# Altium PCB front_flex.PcbDoc (part 1 of 2)
Units mil, origin at the board's own origin, x right, y up, seen from the top; angles counter-clockwise.
Board outline 5591.04 x 1020.3 mil, 4 copper layers (Layer 1 (Top Layer), Layer 2 (PWR), Layer 3 (GND), Layer 4 (Bottom Layer)), stack 21.036 mil thick; 26 components, 44 nets, 150 pads, 87 vias.
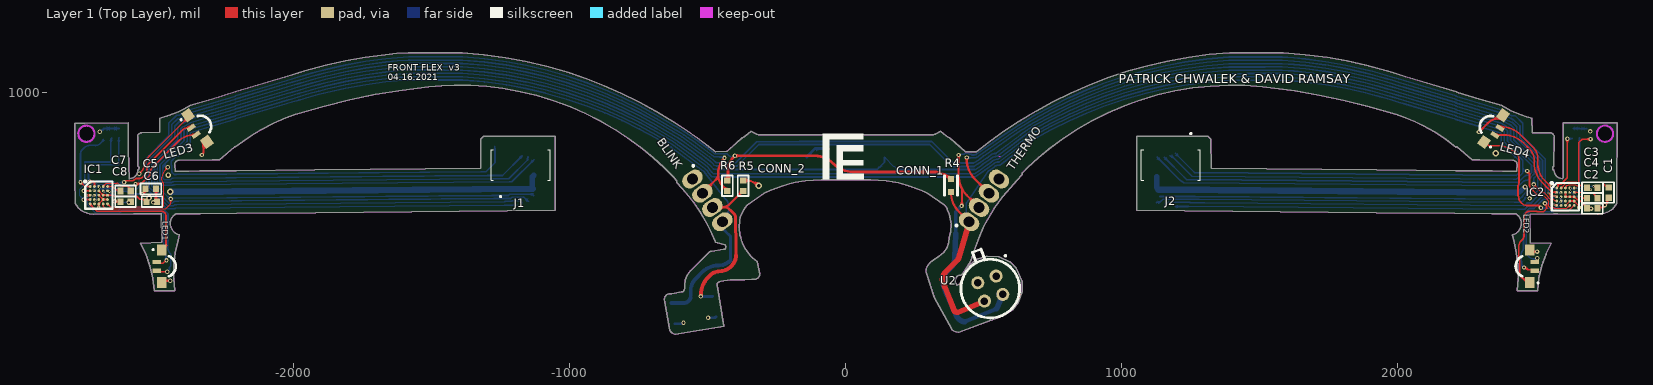
[diagram p0: Layer 1 (Top Layer) view]
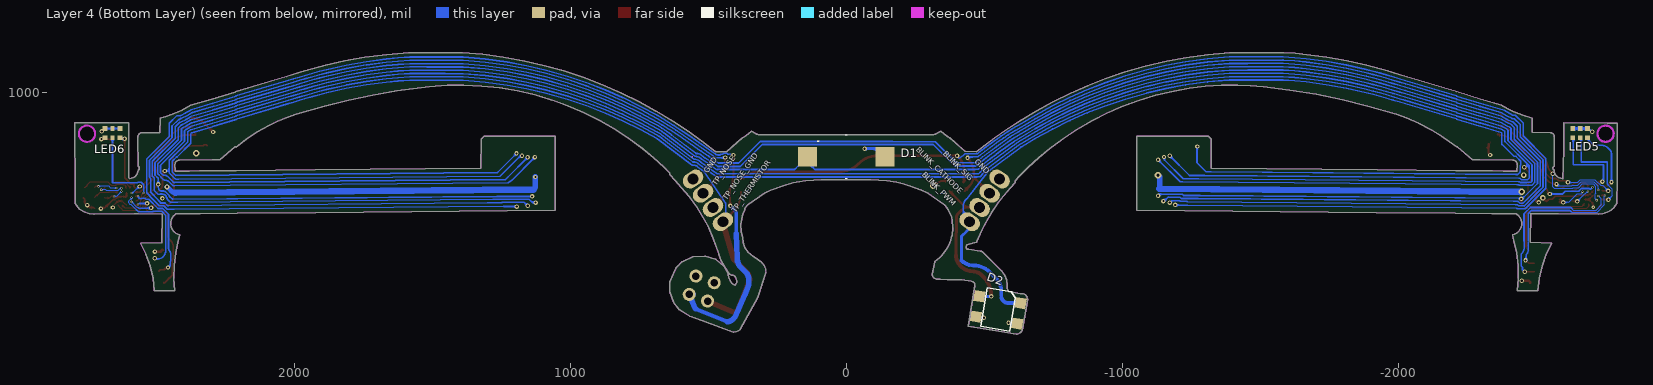
[diagram p1: Layer 4 (Bottom Layer) view, seen from below]
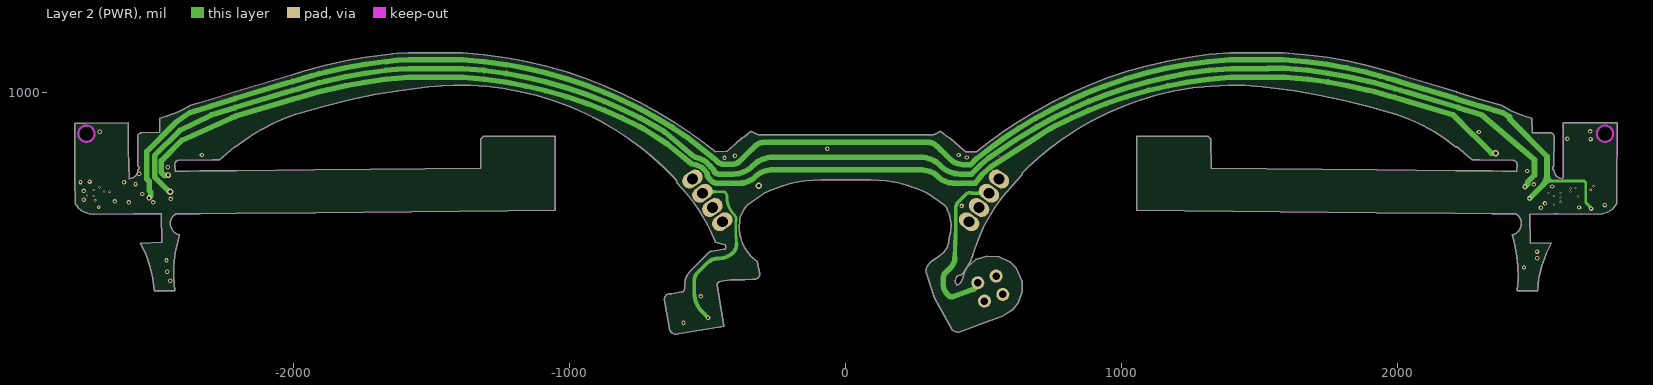
[diagram p2: Layer 2 (PWR)]
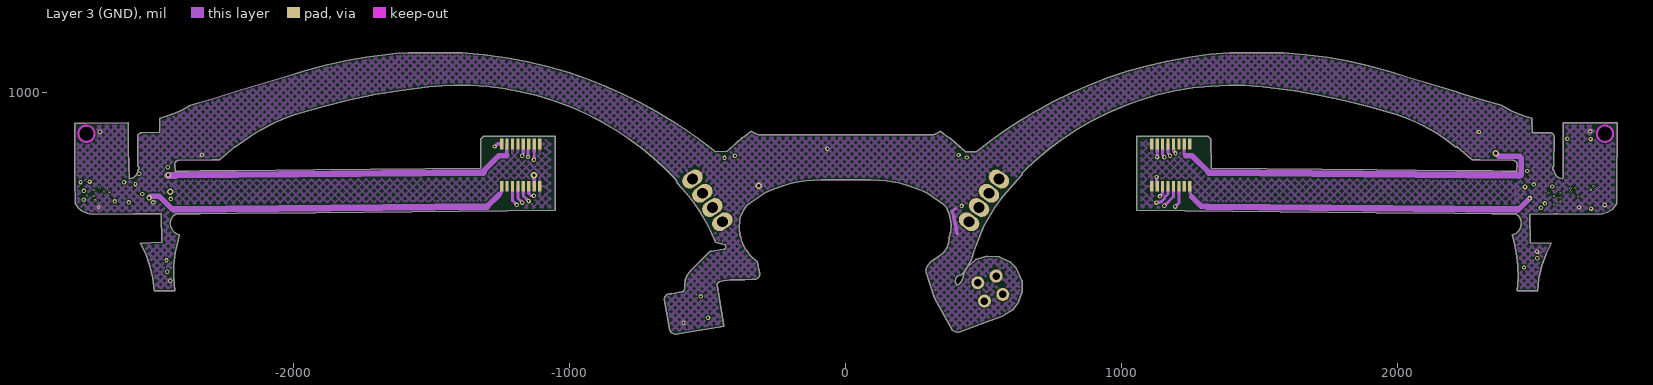
[diagram p3: Layer 3 (GND)]
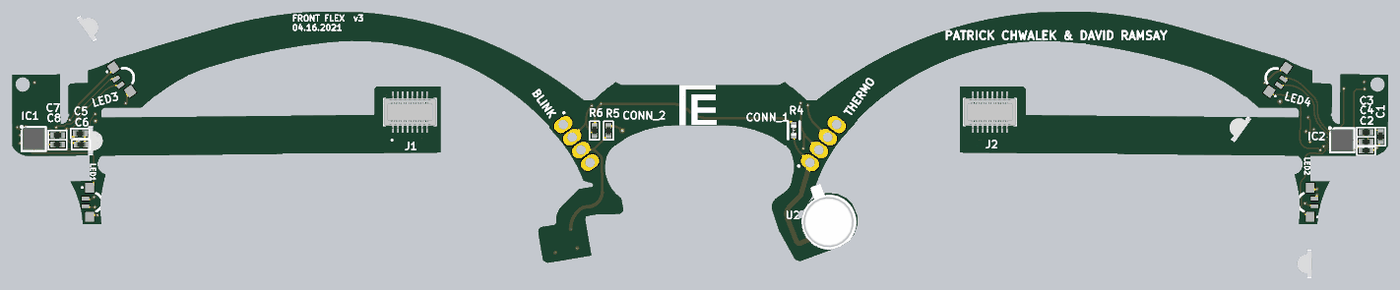
[diagram p5: 3D render of the assembled board from above, using the file's embedded part models]
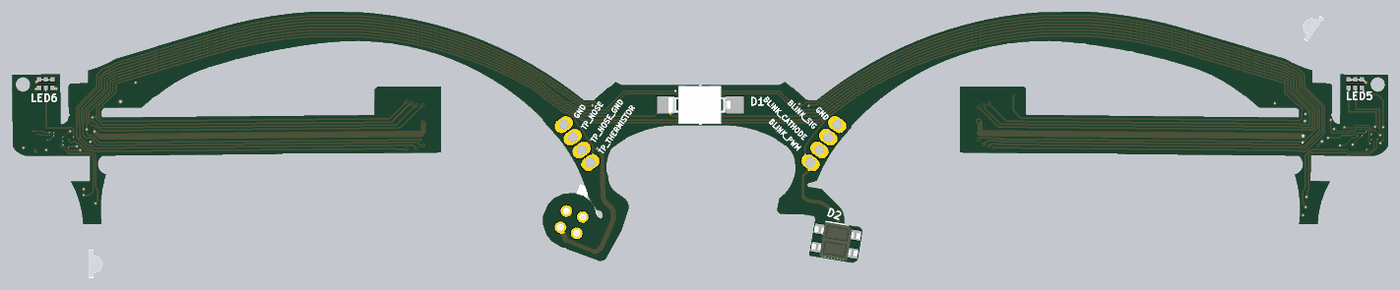
[diagram p6: 3D render of the assembled board from below, using the file's embedded part models]

## Layer stack, top to bottom
Top Solder: solder mask 1, SM-002, Dk 4
Layer 1 (Top Layer): signal copper 0.709
Dielectric 2: prepreg 2.8, PP-006, Dk 4.1
Layer 2 (PWR): signal copper 0.709
Dielectric 1: dielectric 12.6, FR-4, Dk 4.8
Layer 3 (GND): signal copper 0.709
Dielectric 3: prepreg 2.8, PP-006, Dk 4.1
Layer 4 (Bottom Layer): signal copper 0.709
Bottom Solder: solder mask 1, SM-002, Dk 4

## Board outline
570 vertices, not listed, extent -2794.4,125.06 2796.64,1145.35
cut-out: 2745.53,821.61 2750.93,820.83 2756.32,821.06 2761.63,822.28 2766.6,824.41 2771.08,827.44 2774.98,831.26 2778.09,835.71 2780.3,840.67 2781.6,845.91 2781.91,851.34 2781.24,856.73 2779.59,861.89 2777.03,866.65 2773.6,870.91 2769.47,874.41 2764.78,877.13 2762.11,878.23 2759.31,879.05 2753.92,879.8 2748.52,879.61 2743.21,878.39 2738.25,876.22 2733.76,873.19 2729.86,869.37 2726.75,864.92 2724.55,860 2723.25,854.72 2722.93,849.33 2723.6,843.94 2725.26,838.78 2727.82,833.98 2731.24,829.76 2735.38,826.22 2740.06,823.5 2742.74,822.44
cut-out: -2746.95,879.53 -2752.38,879.84 -2755.26,879.57 -2758.13,879.05 -2763.29,877.28 -2768.01,874.65 -2772.18,871.18 -2775.61,866.97 -2778.25,862.24 -2779.98,857.09 -2780.73,851.73 -2780.49,846.3 -2779.27,841.02 -2777.11,836.06 -2774.03,831.57 -2770.22,827.72 -2765.77,824.61 -2760.81,822.4 -2755.53,821.1 -2750.14,820.83 -2747.22,821.06 -2744.35,821.61 -2739.23,823.35 -2734.51,826.02 -2730.33,829.49 -2726.87,833.66 -2724.23,838.43 -2722.5,843.54 -2721.75,848.94 -2721.99,854.33 -2723.25,859.65 -2725.41,864.61 -2728.44,869.09 -2732.26,872.95 -2736.75,876.02 -2741.67,878.27
board region "Layer Stack Region 1": 2429.51,560.75 2380.53,561.18 2341.28,561.53 2207.66,562.76 1922.11,565.39 1054.31,573.35 1054.31,842.87 1312.78,842.87 1323.53,831.85 1324.63,726.22 1326.04,725.79 1925.02,720.31 2210.57,717.72 2342.7,716.5 2382.03,716.14 2430.3,715.75 2432.23,715.74
board region "Layer Stack Region 1": -2424.82,715.71 -2380.81,716.14 -2341.51,716.5 -2209.43,717.72 -1923.84,720.31 -1323.01,726.93 -1322.62,728.31 -1322.62,832.13 -1311.87,842.87 -1053.36,843.15 -1053.36,573.35 -1920.92,565.39 -2206.48,562.76 -2340.1,561.53 -2379.43,561.18 -2423.37,560.78 -2425.18,560.77
board region "Layer Stack Region 1": 534 vertices, not listed, extent -2794.4,125.06 2796.64,1145.35

## Design rules (kind name [scope] priority, off if disabled: settings)
Clearance [All] p1: gap=4 ignorepadtopadclearanceinfootprint=FALSE except(0: Arc-Hole Track-Hole SMDPad-Hole THPad-Hole Via-Hole Fill-Hole Poly-Hole Region-Hole Text-Hole)
DiffPairsRouting [All] p1: maxlimit=10 minlimit=10 mostfreqgap=10 toplayer_minwidth=15 toplayer_maxwidth=15 toplayer_prefwidth=15 midlayer1_minwidth=15 midlayer1_maxwidth=15 midlayer1_prefwidth=15 midlayer2_minwidth=15 midlayer2_maxwidth=15 midlayer2_prefwidth=15 bottomlayer_minwidth=15 bottomlayer_maxwidth=15 bottomlayer_prefwidth=15 substack1={A9119681-F30E-4965-AEFB-5FD7E99CBF57} toplayer_{a9119681-f30e-4965-aefb-5fd7e99cbf57}_minwidth=15 toplayer_{a9119681-f30e-4965-aefb-5fd7e99cbf57}_maxwidth=15 toplayer_{a9119681-f30e-4965-aefb-5fd7e99cbf57}_prefwidth=15 midlayer1_{a9119681-f30e-4965-aefb-5fd7e99cbf57}_minwidth=15 midlayer1_{a9119681-f30e-4965-aefb-5fd7e99cbf57}_maxwidth=15 midlayer1_{a9119681-f30e-4965-aefb-5fd7e99cbf57}_prefwidth=15 midlayer2_{a9119681-f30e-4965-aefb-5fd7e99cbf57}_minwidth=15 midlayer2_{a9119681-f30e-4965-aefb-5fd7e99cbf57}_maxwidth=15 midlayer2_{a9119681-f30e-4965-aefb-5fd7e99cbf57}_prefwidth=15 bottomlayer_{a9119681-f30e-4965-aefb-5fd7e99cbf57}_minwidth=15 bottomlayer_{a9119681-f30e-4965-aefb-5fd7e99cbf57}_maxwidth=15 bottomlayer_{a9119681-f30e-4965-aefb-5fd7e99cbf57}_prefwidth=15 substack2={F6C10761-EC22-4305-87DD-0F5299EFC78A} toplayer_{f6c10761-ec22-4305-87dd-0f5299efc78a}_minwidth=15 toplayer_{f6c10761-ec22-4305-87dd-0f5299efc78a}_maxwidth=15 toplayer_{f6c10761-ec22-4305-87dd-0f5299efc78a}_prefwidth=15 midlayer1_{f6c10761-ec22-4305-87dd-0f5299efc78a}_minwidth=15 midlayer1_{f6c10761-ec22-4305-87dd-0f5299efc78a}_maxwidth=15 midlayer1_{f6c10761-ec22-4305-87dd-0f5299efc78a}_prefwidth=15 midlayer2_{f6c10761-ec22-4305-87dd-0f5299efc78a}_minwidth=15 midlayer2_{f6c10761-ec22-4305-87dd-0f5299efc78a}_maxwidth=15 midlayer2_{f6c10761-ec22-4305-87dd-0f5299efc78a}_prefwidth=15 bottomlayer_{f6c10761-ec22-4305-87dd-0f5299efc78a}_minwidth=15 bottomlayer_{f6c10761-ec22-4305-87dd-0f5299efc78a}_maxwidth=15 bottomlayer_{f6c10761-ec22-4305-87dd-0f5299efc78a}_prefwidth=15 maxuncoupledlength=500
PlaneClearance [All] p1: clearance=8
PlaneConnect GND [InNet('GND')] p1: planeconnectstyle=Direct reliefexpansion=20 reliefentries=4 reliefconductorwidth=10 reliefairgap=10
PlaneConnect [All] p2: planeconnectstyle=Direct reliefexpansion=20 reliefentries=4 reliefconductorwidth=10 reliefairgap=10
PolygonConnect GND_1 [InNet('GND')] p1: thpad.connectstyle=Relief thpad.reliefconductorwidth=10 thpad.reliefentries=4 thpad.polygonreliefangle="90 Angle" thpad.airgapwidth=10 smdpad.connectstyle=Relief smdpad.reliefconductorwidth=10 smdpad.reliefentries=4 smdpad.polygonreliefangle="90 Angle" smdpad.airgapwidth=10 via.connectstyle=Direct via.reliefconductorwidth=10 via.reliefentries=4 via.polygonreliefangle="90 Angle" via.airgapwidth=10
PolygonConnect [All] p2: connectstyle=Relief reliefconductorwidth=10 reliefentries=4 polygonreliefangle="90 Angle" airgapwidth=10
RoutingCorners [All] p1: cornerstyle=Round minsetback=100 maxsetback=100
RoutingVias [All] p1: holewidth=8 width=16 viastyle="Through Hole" minholewidth=4 minwidth=8 maxholewidth=12 maxwidth=24
SolderMaskExpansion [All] p1: expansion=4 istentingtop=FALSE
Width POWER [InNet('3.3V') or InNet('5V') or InNet('BATTERY_1') or InNet('VBAT')] p1: maxlimit=30 minlimit=4 preferedwidth=20 toplayer_prefwidth=8 midlayer1_prefwidth=10 bottomlayer_prefwidth=8 substack1={A9119681-F30E-4965-AEFB-5FD7E99CBF57} substack2={F6C10761-EC22-4305-87DD-0F5299EFC78A} minimp=50.000000 maximp=50.000000 favimp=50.000000
Width [All] p2: maxlimit=10 minlimit=4 preferedwidth=10 toplayer_prefwidth=6 midlayer1_minwidth=10 midlayer2_minwidth=10 bottomlayer_prefwidth=6 substack1={A9119681-F30E-4965-AEFB-5FD7E99CBF57} substack2={F6C10761-EC22-4305-87DD-0F5299EFC78A} minimp=50.000000 maximp=50.000000 favimp=50.000000
26 further rules are at their usual default settings.

## Classes and differential pairs
component class Sch_led: C1 C2 C3 C4 C5 C6 C7 C8 IC1 IC2 J1 J2 LED1 LED2 LED3 LED4 LED5 LED6
component class Sch_front: CONN_1 CONN_2 D1 D2 R4 R5 R6 U2

## Components (designator, comment, footprint, x,y, rotation, side; value= is the part's Value field where it differs from the comment)
C1 "1µF" 0402R 2765.05,638.31 r90 top
C2 "1µF" 0402R 2706.02,581.51 r180 top
C3 "0.47µF" 0402R 2706.01,656.3 r180 top
C4 "0.47µF" 0402R 2706.02,616.93 r180 top
C5 "1µF" 0402R -2518.48,651.43 r180 top
C6 "1µF" 0402R -2514.43,605.63 r180 top
C7 "0.47µF" 0402R -2610.08,643.98 r0 top
C8 "0.47µF" 0402R -2610.08,605.63 r180 top
CONN_1 "THERMO" 4_POS_1MM_HEADER 501.25,610.02 r55 top
CONN_2 "BLINK" 4_POS_1MM_HEADER -501.25,610.02 r305 top
D1 "VBPW34FASR" VBPW34FAS 0,767.67 r180 bottom
D2 "QRE1113GR" *4LEADSMD_QRE1113GR(PRIMARY) -550.53,212.31 r9.5 bottom
IC1 "LP5523TM_NOPB" BGA25C40P5X5_226X226X68 -2706.84,628.81 r0 top
IC2 "LP5523TM_NOPB" BGA25C40P5X5_226X226X68 2608.64,623.29 r0 top
J1 "55560-0168" 555600168 -1178.04,737.95 r0 top
J2 "55560-0168" 555600168 1178.03,737.95 r180 top
LED1 "APFA3010SEKJ3ZGKQBKC" KPFA-3010RGBC-11 -2486.98,371.04 r90 top
LED2 "APFA3010SEKJ3ZGKQBKC" KPFA-3010RGBC-11 2486.98,371.04 r270 top
LED3 "APFA3010SEKJ3ZGKQBKC" KPFA-3010RGBC-11 -2355.09,866.3 r125.5 top
LED4 "APFA3010SEKJ3ZGKQBKC" KPFA-3010RGBC-11 2353.64,865.3 r234.5 top
LED5 "SMLP36RGB2W3R" ROHM-1510-(0604) -2659.41,853.66 r180 bottom
LED6 "SMLP36RGB2W3R" ROHM-1510-(0604) 2659.41,853.66 r180 bottom
R4 "100k" SMD-0402-RES 381.34,664.08 r180 top
R5 "100" 0402R -372.08,662.99 r270 top
R6 "51.1K" 0402R -428.65,662.99 r90 top
U2 "ZTP-135SR" ZTP-135SR 524.02,290.32 r335 top

## Footprints (in the part's own frame and the unit in brackets; to place one, negate y for a bottom-side part, rotate by r counter-clockwise, add the part's x,y. Pads: shape width x height; smd on the part's side, far side on the other; paste and mask are expansions set on the pad)
4_POS_1MM_HEADER [mm]
  oval 1.4x2 hole 1: 1(-2.4,0) 2(-0.8,0) 3(0.8,0) 4(2.4,0)
  silkscreen extent -3.4,0.7 -3.3,0.8
0402R [mm]
  rect 0.559x0.6 smd: 1(-0.48,0) 2(0.48,0)
  silkscreen extent -0.95,-0.5 0.95,0.5, body extent -0.46,-0.25 0.5,0.25, height 0.3
555600168 [mm]
  rect 0.3x1 on Mid1: 1(-1.75,-1.95) 2(-1.75,1.95) 3(-1.25,-1.95) 4(-1.25,1.95) 5(-0.75,-1.95) 6(-0.75,1.95) 7(-0.25,-1.95) 8(-0.25,1.95) 9(0.25,-1.95) 10(0.25,1.95) 11(0.75,-1.95) 12(0.75,1.95) 13(1.25,-1.95) 14(1.25,1.95) 15(1.75,-1.95) 16(1.75,1.95)
  silkscreen extent -2.73,-2.95 2.73,1.42, body extent -2.72,-2.15 2.73,2.15, height 1.16
*4LEADSMD_QRE1113GR(PRIMARY) [mm]
  rect 1x1 smd: A(-1.93,-0.97) C(1.93,0.94) E(-1.93,0.94) K(1.93,-0.97)
  silkscreen extent -1.35,-1.85 1.35,1.75, body extent -2.4,-1.8 2.4,1.8, height 1.85
BGA25C40P5X5_226X226X68 [mil]
  round 10 smd: A1(-31.5,31.5) A2(-15.75,31.5) A3(0,31.5) A4(15.75,31.5) A5(31.5,31.5) B1(-31.5,15.75) B2(-15.75,15.75) B3(0,15.75) B4(15.75,15.75) B5(31.5,15.75) C1(-31.5,0) C2(-15.75,0) C3(0,0) C4(15.75,0) C5(31.5,0) D1(-31.5,-15.75) D2(-15.75,-15.75) D3(0,-15.75) D4(15.75,-15.75) D5(31.5,-15.75) E1(-31.5,-31.5) E2(-15.75,-31.5) E3(0,-31.5) E4(15.75,-31.5) E5(31.5,-31.5)
  silkscreen extent -53,-49 49,53, body extent -44,-44 44,44, height 27
KPFA-3010RGBC-11 [mm]
  rect 1x0.9 smd: 1(1.5,-0.2) 2(-1.5,-0.2)
  rect 0.4x0.8 smd: 3(-0.4,0.25) 4(0.4,0.25)
  silkscreen extent -0.92,-1.5 1.54,0.59, body extent -1.36,-1.55 1.64,-0.05, height 1.02
ROHM-1510-(0604) [mm]
  rect 0.45x0.45 smd: 1(-0.675,-0.425) 3(0.675,-0.425) 4(0.675,0.425) 6(-0.675,0.425)
  rect 0.4x0.45 smd: 2(0,-0.425) 5(0,0.425)
SMD-0402-RES [mm]
  rect 0.55x0.55 smd: 1(0,0.584) 2(0,-0.584)
  silkscreen extent -0.6,-0.9 0.6,0.9, body extent -0.28,-0.57 0.27,0.58, height 0.41
VBPW34FAS [mm] "IR Photodiode SMD (Vive)"
  rect 1.75x1.8 smd: 1(-3.575,0) 2(3.575,0)
  silkscreen extent -2.65,-2 0.08,2, body extent -3.29,-1.95 3.11,1.95, height 1.48
ZTP-135SR [mm]
  round 1.2 hole 0.7: 1(0,1.27) 2(1.27,0) 3(0,-1.27) 4(-1.27,0)
  silkscreen extent -2.9,-2.7 2.7,3.35, body extent -3.24,-2.79 2.74,3.19, height 2.67

## Part data
C1 C2 C5 C6: library part GCM155C71A105KE38D, "CAP CER 1UF 10V X7S 0402", Digi-Key Part Number=490-13409-1-ND, Manufacturer="Murata Electronics North America", Operating Temperature="-55°C ~ 125°C", Package / Case="0402 (1005 Metric)", Ratings=AEC-Q200, Temperature Coefficient=X7S, Tolerance=±10%, Voltage=10V, @ qty=0, Applications=Automotive, Datasheets=http://www.murata.com/~/media/webrenewal/support/library/catalog/products/capacitor/mlcc/c03e.ashx, Factory Stock=0, Features=-, Height - Seated (Max)=-, Image=//media.digikey.com/Renders/Murata%20Renders/ZRB-SERIES-0402.jpg, Lead Spacing=-, Lead Style=-, Minimum Quantity=1, Mounting Type="Surface Mount, MLCC", Packaging="Cut Tape (CT)", Part Number=GCM155C71A105KE38D, Part Status=Active, Quantity Available=7240, Series=GCM, Size / Dimension="0.039\" L x 0.020\" W (1.00mm x 0.50mm)", Thickness (Max)="0.022\" (0.55mm)", Unit Price (USD)=0.12
C3 C4 C7 C8: library part GCM155C71A105KE38D, "CAP CER 0.47UF 10V X7S 0402", Digi-Key Part Number=490-13409-1-ND, Manufacturer="Murata Electronics North America", Operating Temperature="-55°C ~ 125°C", Package / Case="0402 (1005 Metric)", Ratings=AEC-Q200, Temperature Coefficient=X7S, Tolerance=±10%, Voltage=10V, @ qty=0, Applications=Automotive, Datasheets=http://www.murata.com/~/media/webrenewal/support/library/catalog/products/capacitor/mlcc/c03e.ashx, Factory Stock=0, Features=-, Height - Seated (Max)=-, Image=//media.digikey.com/Renders/Murata%20Renders/ZRB-SERIES-0402.jpg, Lead Spacing=-, Lead Style=-, Minimum Quantity=1, Mounting Type="Surface Mount, MLCC", Packaging="Cut Tape (CT)", Part Number=GCM155C71A105KE38D, Part Status=Active, Quantity Available=7240, Series=GCM, Size / Dimension="0.039\" L x 0.020\" W (1.00mm x 0.50mm)", Thickness (Max)="0.022\" (0.55mm)", Unit Price (USD)=0.12
CONN_1 CONN_2: library part 4_pin_1mm_header
D1: "Diode", Manufacturer_Name=Vishay, Mouser Part Number=782-VBPW34FASR, RS Part Number=7689401, Datasheet Link=https://www.vishay.com/docs/81127/vbpw34fa.pdf, Height=1.3mm, Manufacturer_Part_Number=VBPW34FASR, Mouser Price/Stock=https://www.mouser.com/Search/Refine.aspx?Keyword=782-VBPW34FASR, RS Price/Stock=https://uk.rs-online.com/web/p/products/7689401
D2: "QRE1113 Series 30 V 50 mA Miniature Reflective Object Sensor - SMD-4", Package="SMD-4 ON Semiconductor", Availability=Unavailable, MF="ON Semiconductor", MP=QRE1113GR, Price=None, SnapEDA_Link=https://www.snapeda.com/parts/QRE1113GR/ON%20Semiconductor/view-part/?ref=snap
IC1 IC2: "Integrated Circuit", Manufacturer_Name="Texas Instruments", Manufacturer_Part_Number=LP5523TM/NOPB, Datasheet Link=http://www.ti.com/lit/gpn/lp5523, Height=0.675mm
J1 J2: "Connector", Manufacturer_Name=Molex, Mouser Part Number=538-55560-0168, RS Part Number=7206558P, Allied_Number=70374726, Allied Price/Stock=https://www.alliedelec.com/molexincorporated-55560-0168/70374726/, Datasheet Link=https://www.molex.com/pdm_docs/sd/555600168_sd.pdf, Height=1.15mm, Manufacturer_Part_Number=55560-0168, Mouser Price/Stock=https://www.mouser.com/Search/Refine.aspx?Keyword=538-55560-0168, RS Price/Stock=http://uk.rs-online.com/web/p/products/7206558P
LED1 LED2 LED3 LED4: "LED", Manufacturer_Name=Kingbright, Mouser Part Number=604-APFA3010SEKJ3ZGK, Allied_Number=70820377, Allied Price/Stock=https://www.alliedelec.com/kingbright-apfa3010sekj3zgkqbkc/70820377/, Datasheet Link=http://www.kingbrightusa.com/images/catalog/SPEC/APFA3010SEKJ3ZGKQBKC.pdf, Manufacturer_Part_Number=APFA3010SEKJ3ZGKQBKC, Mouser Price/Stock=https://www.mouser.com/Search/Refine.aspx?Keyword=604-APFA3010SEKJ3ZGK
LED5 LED6: "LED", Manufacturer_Name="ROHM Semiconductor", Mouser Part Number=755-SMLP36RGB2W3R, RS Part Number=1246884, Datasheet Link=http://www.rohm.com/web/global/datasheet/SMLP36RGB2W(R), Manufacturer_Part_Number=SMLP36RGB2W3R, Mouser Price/Stock=https://www.mouser.com/Search/Refine.aspx?Keyword=755-SMLP36RGB2W3R, RS Price/Stock=https://uk.rs-online.com/web/p/products/1246884
R4: library part ERJ-2GEJ104X, "RES SMD 100K OHM 5% 1/10W 0402", Digi-Key Part Number=P100KJCT-ND, Manufacturer="Panasonic Electronic Components", Operating Temperature="-55°C ~ 155°C", Package / Case="0402 (1005 Metric)", Power (Watts)="0.1W, 1/10W", Supplier Device Package=0402, Temperature Coefficient=±200ppm/°C, Tolerance=±5%, @ qty=1500, Composition="Thick Film", Datasheets=http://industrial.panasonic.com/www-cgi/jvcr13pz.cgi?E+PZ+3+AOA0001+ERJ2GEJ104X+7+WW, Factory Stock=0, Failure Rate=-, Features="Automotive AEC-Q200", Height - Seated (Max)="0.016\" (0.40mm)", Image=//media.digikey.com/Photos/Panasonic%20Photos/ERJ-PA2-Series.jpg, Minimum Quantity=1, Number of Terminations=2, Packaging="Cut Tape (CT)", Part Number=ERJ-2GEJ104X, Part Status=Active, Quantity Available=2387986, Series=ERJ, Size / Dimension="0.039\" L x 0.020\" W (1.00mm x 0.50mm)", Unit Price (USD)=0.00350
R5: library part Resistor
R6: library part Resistor, "CRCW040251K1FKED"
U2: "Undefined or Miscellaneous", Manufacturer_Name="Amphenol Advanced Sensors", Mouser Part Number=527-ZTP-135SR, Allied_Number=70282698, Allied Price/Stock=https://www.alliedelec.com/amphenol-advanced-sensors-ztp-135sr/70282698/, Datasheet Link=https://www.amphenol-sensors.com/en/component/edocman/370-thermopile-ir-sensor-applications/download?Itemid=7967, Manufacturer_Part_Number=ZTP-135SR, Mouser Price/Stock=https://www.mouser.com/Search/Refine.aspx?Keyword=527-ZTP-135SR

## Via types
v1: diameter 16, hole 8, Layer 1 (Top Layer) to Layer 4 (Bottom Layer), tented both sides, 43 vias
v2: diameter 8, hole 4, Layer 1 (Top Layer) to Layer 4 (Bottom Layer), tented both sides, 19 vias
v3: diameter 16, hole 8, Layer 3 (GND) to Layer 4 (Bottom Layer), tented both sides, 17 vias
v4: diameter 24, hole 12, Layer 1 (Top Layer) to Layer 4 (Bottom Layer), tented both sides, 3 vias
v5: diameter 20, hole 10, Layer 1 (Top Layer) to Layer 4 (Bottom Layer), tented both sides, 2 vias
v6: diameter 18, hole 8, Layer 1 (Top Layer) to Layer 4 (Bottom Layer), tented both sides, 1 vias
v7: diameter 12, hole 6, Layer 1 (Top Layer) to Layer 4 (Bottom Layer), tented both sides, 1 vias
v8: diameter 24, hole 12, Layer 3 (GND) to Layer 4 (Bottom Layer), tented both sides, 1 vias

## Nets (pads, with @x,y where several pads share a name; then routed paths per layer and width w, separated by ;. In a path a pad name is that pad's centre, name@x,y a point inside that pad or via, vN(x,y) a via of type N, cw(c..) or ccw(c..) an arc to the next point about the centre after c; other vN are vias at no path point)
3.3V: J1.5 R4.2 R6.2 | length 4799
  Layer 1 (Top Layer) w10: R6.2@-428.65,681.89 ccw(c-434.31,687.55) -426.3,687.55 -426.3,719.92 cw(c-361.88,719.92) -407.44,765.47 v1(-401.49,771.42) -111.65,771.42 cw(c-111.65,677.91) -45.53,744.03 -44.07,742.57 ccw(c26.64,813.28) 26.64,713.28 318.08,713.28 cw(c318.08,623.82) R4.2@381.34,687.08 ; R6.2@-426.39,678.52 R6.2@-424.46,676.59
  Layer 3 (GND) w10: J1.5@-1207.57,661.18 -1207.57,609.07 v3(-1192.04,593.54)
  Layer 4 (Bottom Layer) w6: v3@-1192.04,591.99 -1192.89,592.84 -1236.74,592.84 -2430.07,581.9 -2430.21,581.9 -2431.91,580.19 -2444.01,580.19 -2444.51,579.69 -2460.74,579.69 -2475.35,594.3 -2534.88,653.83 -2534.88,761.79 -2452.92,843.75 -2452.92,890.28 -2424.96,918.24 -2415.31,918.24 -2384.45,936.57 -2296.29,962.47 -2212.03,987.84 -2212.05,989.31 -2027.38,1043.99 -2004.16,1050.86 -1981.48,1057.58 -1958.79,1064.3 -1934.04,1071.43 -1909.34,1078.15 -1884.54,1084.49 -1812.46,1100.67 -1739.75,1113.65 -1667.03,1123.33 -1624.87,1127.45 -1582.61,1130.47 -1520.87,1130.42 -1454.76,1130.33 -1388.64,1130.2 -1308.84,1123.29 -1229.5,1112.41 -1158.68,1099.25 -1088.65,1082.93 -1011.52,1061.06 -935.43,1035.32 -872.62,1010.82 -810.87,983.68 -747.3,952.45 -685.15,918.5 -624.51,881.9 -612.61,876.29 -581.43,857.37 -560.3,843.15 -534.44,824.28 -500.04,798.98 -479.44,782.4 -474.95,779.56 -462.07,778.39 -446.19,778.39 -445.52,779.06 -430.32,779.06 -422.65,771.39 -407.66,763.39
5V: J1.13 J2.14 | length 8474.4
  Layer 3 (GND) w10: v8(-1129.82,701.02) -1129.82,680.69 -1129.74,680.61 -1129.74,662.09 J1.13@-1128.83,661.18 ; v3(1126.77,694.87) 1126.77,681.72 1127.91,680.58 1127.91,662.09 J2.14@1128.82,661.18
  Layer 2 (PWR) w20: v4(-2447.81,640.97) -2451.37,640.97 -2504.88,694.49 -2504.88,771.99 -2413.25,863.62 -2300.83,918.33 -2300.54,918.42 ; -2296.79,919.87 -2212.54,945.24 -2212.55,946.71 -2027.88,1001.39 -2004.67,1008.27 -1981.98,1014.99 -1959.29,1021.71 -1934.54,1028.84 -1909.85,1035.55 -1885.04,1041.9 -1812.96,1058.07 -1740.25,1071.06 -1667.53,1080.74 -1625.37,1084.85 -1583.11,1087.87 -1521.37,1087.82 -1455.26,1087.74 -1389.14,1087.61 -1309.35,1080.7 -1230,1069.81 -1159.18,1056.65 -1089.15,1040.34 -1012.02,1018.46 -935.93,992.73 -873.12,968.22 -811.37,941.09 -747.8,909.86 -685.65,875.9 -655.33,857.6 -556.5,773.72 -544.91,766.19 -526.56,760.81 -517.02,756.2 -503.94,747.65 -491.02,734.73 cw(c-492.99,732.78) -490.22,732.78 -480.87,723.43 cw(c-492.15,712.14) -476.19,712.14 ccw(c-459.9,728.43) -459.9,705.39 -407.7,705.39 ccw(c-407.7,805.39) -336.99,734.68 -335.05,736.62 cw(c-264.34,665.91) -264.34,765.91 271.97,765.91 cw(c271.97,665.91) 342.68,736.62 344.72,734.58 ; 344.75,734.55 ccw(c414.87,804.73) 414.87,705.52 455.96,705.52 492.08,741.64 518.88,763.66 613.79,828.13 693.14,876.03 755.29,909.99 818.86,941.22 880.62,968.35 943.42,992.86 1019.52,1018.59 1096.65,1040.47 1166.68,1056.78 1237.5,1069.94 1316.84,1080.83 1396.64,1087.74 1462.75,1087.87 1528.87,1087.96 1590.61,1088 1632.87,1084.98 1675.03,1080.87 1747.74,1071.19 1820.45,1058.21 1892.54,1042.03 1917.34,1035.68 1942.04,1028.97 1966.79,1021.84 1989.48,1015.12 2012.16,1008.4 2035.37,1001.52 2220.04,946.84 2220.03,945.37 2304.29,920 2496.4,756.74 2496.4,701.92 2471.36,676.87 2471.36,668.85 v6@2464.72,662.21
  Layer 4 (Bottom Layer) w18: 2430.83,637.81 ccw(c2430.83,660.71) 2447.03,644.52 v6(2461.72,659.21)
  Layer 4 (Bottom Layer) w20: v4(-2447.81,640.97) -2438.32,640.97 v4@-2436.54,639.19 ; -1135.17,652.17 -1135.17,695.67 v8(-1129.82,701.02) ; v3(1126.77,694.87) 1126.77,690.21 1126.58,690.02 1126.58,657.15 1134.03,649.7
  Layer 4 (Bottom Layer) w25: v4@-2442.86,640.18 -1135.17,652.17 ; 1134.03,649.7 2430.83,637.81
BATTERY_1: J1.4 J2.3 | length 7986.3
  Layer 3 (GND) w10: v5@-2458.08,700.29 -2456.75,701.61 v5(-2455.44,701.61) ; -1228.81,771.84 -1228.81,794.65 -1228.16,795.3 -1228.16,813.82 J1.4@-1227.26,814.72 ; 1226.31,793.66 1226.31,777.34 1231.92,771.73
  Layer 3 (GND) w20: -1309.05,719.78 -1256.99,771.84 -1228.81,771.84 ; 1231.92,771.73 1254.59,771.73 1315.99,710.33 ; v4(2356.48,780.71) 2366.67,770.53 2442.16,770.53 2448.38,764.32 2448.38,702.31 2445.12,699.05
  Layer 3 (GND) w25: v5@-2458.08,700.29 -2428.97,700.29 ; -2422.55,701 -1312.36,711.18 ; 1315.99,710.33 2437.99,700.05
  Layer 2 (PWR) w20: v5(-2455.44,701.61) -2465.99,701.61 -2468.3,699.3 -2480.5,711.5 -2480.5,753.43 -2406.86,827.08 -2225.73,909.08 -2212.55,913.04 -2212.57,914.51 -2027.9,969.19 -2004.69,976.07 -1982,982.79 -1959.31,989.51 -1934.56,996.64 -1909.86,1003.35 -1885.06,1009.7 -1812.98,1025.88 -1740.27,1038.86 -1667.55,1048.54 -1625.39,1052.65 -1583.13,1055.67 -1521.39,1055.62 -1455.28,1055.54 -1389.16,1055.41 -1309.36,1048.5 -1230.02,1037.61 -1159.2,1024.45 -1089.17,1008.14 -1012.04,986.26 -935.95,960.53 -873.14,936.02 -811.39,908.89 -747.82,877.66 -732.28,869.17 -646.69,814.44 -558.92,742.19 -543.33,738.91 -519.08,728.85 -502.39,708.22 ccw(c-474.55,708.22) -494.24,688.53 -485.86,680.15 ccw(c-467.23,698.78) -467.23,672.44 -384.6,672.44 ccw(c-384.6,754.84) -326.33,696.57 cw(c-269.38,639.62) -269.38,720.16 275.78,720.16 cw(c275.78,636.68) 334.75,695.77 cw(c275.78,636.68) 334.82,695.71 ccw(c390.69,751.58) 390.69,672.57 469.98,672.57 493.33,702.12 525.19,730.93 654.19,814.57 739.77,869.3 755.31,877.79 818.88,909.02 880.64,936.15 943.44,960.66 1019.54,986.39 1096.67,1008.27 1166.7,1024.58 1237.52,1037.74 1316.86,1048.63 1396.66,1055.54 1462.77,1055.67 1528.88,1055.76 1590.62,1055.8 1632.88,1052.78 1675.04,1048.67 1747.76,1038.99 1820.47,1026.01 1892.56,1009.83 1917.36,1003.48 1942.06,996.77 1966.81,989.64 1989.49,982.92 2012.18,976.2 2035.39,969.32 2200.08,920.56 2270.47,850.17 ; 2272.91,849.59 2272.91,848.71 2340.14,781.48 2355.72,781.48 v4(2356.48,780.71)
BLINK_CATHODE: CONN_2.3 D2.K R5.2 | length 587.2
  Layer 1 (Top Layer) w4: CONN_2.3@-483.18,584.21 CONN_2.3@-448.37,584.21 ; R5.2@-374.11,643.25 cw(c-372.08,641.23) -373.07,643.92 cw(c-372.08,641.23) R5.2@-372.08,644.09
  Layer 1 (Top Layer) w8: CONN_2.3@-448.37,584.21 ccw(c-448.37,620.95) -436.24,586.27 ccw(c-448.37,620.95) -422.39,594.98 R5.2@-374.11,643.25
  Layer 1 (Top Layer) w10: v1(-525.03,261.81) v1@-525.03,265.74 ; -436.24,586.27 cw(c-457.05,534.75) -417.76,574.04 -403.54,559.83 cw(c-413.1,550.27) -399.58,550.27 -399.58,493.16 cw(c-405.24,487.51) -397.24,487.51 -397.24,411.02
  Layer 1 (Top Layer) w14: v1@-525.03,265.74 cw(c-430.11,265.74) -497.23,332.86 -492.01,338.09 cw(c-455.79,301.87) -455.79,353.09 ccw(c-455.79,406.73) -417.86,368.8 -412.52,374.14 ccw(c-449.4,411.02) -397.24,411.02
  Layer 4 (Bottom Layer) w10: v1(-525.03,261.81) -483.59,261.81 ccw(c-483.59,264.21) D2.K@-481.89,262.51
BLINK_PWM: CONN_2.4 D2.A J1.2 | length 4132.4
  Layer 1 (Top Layer) w6: CONN_2.4@-442.08,525.52 ccw(c-442.08,532.53) -437.13,527.57 CONN_2.4@-432.41,532.3
  Layer 3 (GND) w10: v3(-1272.3,805.2) -1262.78,814.72 J1.2@-1246.94,814.72
  Layer 4 (Bottom Layer) w6: -2375.27,853.83 -2375.27,811.97 -2378.2,811.97 -2420.87,769.3 -2426.87,769.3 -2444.26,751.91 -2444.26,738.68 -2442.09,736.51 -2442.09,716.8 ccw(c-2431.24,716.8) -2438.91,709.13 -2433.57,703.78 -2426.99,703.78 -1321.89,713.92 -1303.42,713.92 -1271.24,746.1 -1271.24,793.42 -1271.48,793.66 -1271.48,804.38 v3(-1272.3,805.2) ; -2375.27,855.33 -2298.01,878.29 -2297.73,878.37 ; -2296.29,878.47 -2212.03,903.84 -2212.05,905.31 -2027.38,959.99 -2004.16,966.86 -1981.48,973.58 -1958.79,980.3 -1934.04,987.43 -1909.34,994.15 -1884.54,1000.49 -1812.46,1016.67 -1739.75,1029.65 -1667.03,1039.33 -1624.87,1043.45 -1582.61,1046.47 -1520.87,1046.42 -1454.76,1046.33 -1388.64,1046.2 -1308.84,1039.29 -1229.5,1028.41 -1158.68,1015.25 -1088.65,998.93 -1011.52,977.06 -935.43,951.32 -872.62,926.82 -810.87,899.68 -747.3,868.45 -685.15,834.5 -633.35,803.23 -515,715.73 -435.84,615.43 cw(c-464.96,586.31) -423.78,586.31 -423.78,582.43 cw(c-487.88,582.43) CONN_2.4@-442.56,537.11 ; CONN_2.4@-436.79,520.99 -436.79,531.38 CONN_2.4@-415.14,553.03
  Layer 4 (Bottom Layer) w10: -562.56,256.5 ccw(c-588.5,264.26) -561.43,264.26 ; CONN_2.4@-447.05,532.61 -447.05,509.76 -436.96,499.66 ; -436.96,499.62 -417.4,480.06 -417.4,392.41
  Layer 4 (Bottom Layer) w14: D2.A@-631.78,237.43 -587.92,237.43 ccw(c-587.92,263.68) -569.35,245.12 ccw(c-588.5,264.26) -562.56,256.5 ; -561.43,264.26 -561.43,291.72 cw(c-495.16,279.4) -542.82,327.06 -519.94,349.94 cw(c-461.34,291.34) -461.34,374.21 ccw(c-461.34,436.36) -417.4,392.41
BLINK_SIG: CONN_2.2 D2.C J1.7 R6.1 | length 4748.1
  Layer 1 (Top Layer) w8: CONN_2.2@-519.31,635.82 -470.64,684.49 ccw(c-491.16,705.04) -462.12,705.04 ; v1(-439.31,764.06) ccw(c-384.24,708.99) -462.12,708.99 -462.12,705.04 ; R6.1@-428.65,644.09 -429.46,644.09 -438.46,653.09 -438.46,653.91 -445.49,660.93 cw(c-405.34,701.08) -462.12,701.08 -462.12,705.04
  Layer 3 (GND) w10: J1.7@-1187.89,661.18 -1187.89,617.67 v3(-1172.24,602.02)
  Layer 2 (PWR) w10: CONN_2.2@-519.31,635.82 cw(c-506.06,622.56) -506.06,641.31 -443.64,641.31 cw(c-443.64,631.09) -436.42,638.31 cw(c-451.01,623.72) -430.37,623.72 -430.37,621.25 ccw(c-342.13,621.25) -404.52,558.85 -404.61,558.77 cw(c-424.12,539.25) -396.52,539.25 -396.52,538.22 ccw(c-392.62,534.32) -398.14,534.32 -398.14,494.61 -395.89,449.75
  Layer 2 (PWR) w14: -502.08,382.18 -538.5,345.76 ccw(c-513.9,321.16) -548.69,321.16 -548.69,275.89 ccw(c-448.69,275.89) -519.4,205.18 v1(-498.66,184.43) ; -502.07,382.19 cw(c-459.88,339.98) -459.88,399.66 ccw(c-459.88,473.48) -407.69,421.28 ccw(c-436.16,449.75) -395.89,449.75
  Layer 4 (Bottom Layer) w6: -2297.73,950.37 -2298.01,950.29 -2375.27,927.33 -2393.36,916.85 -2412,907.34 -2413.04,906.3 -2420.57,906.3 -2442.09,884.78 -2442.09,840.44 -2524.88,757.64 -2524.88,657.97 -2513.73,646.82 -2504.49,637.57 -2456.6,589.69 -2456.1,590.19 -2436.05,590.19 -2431.68,594.57 -2424.27,594.57 -1235.74,605.47 -1234.2,607.01 -1209.55,607.01 -1208.26,608.31 -1198.48,608.31 -1198.25,608.54 -1180.99,608.54 -1174.48,602.02 v3(-1172.24,602.02) -1172.24,600.43 -1172.89,600.43 v3@-1173.36,600.91 ; -2296.29,950.47 -2212.03,975.84 -2212.05,977.31 -2027.38,1031.99 -2004.16,1038.86 -1981.48,1045.58 -1958.79,1052.3 -1934.04,1059.43 -1909.34,1066.15 -1884.54,1072.49 -1812.46,1088.67 -1739.75,1101.65 -1667.03,1111.33 -1624.87,1115.45 -1582.61,1118.47 -1520.87,1118.42 -1454.76,1118.33 -1388.64,1118.2 -1308.84,1111.29 -1229.5,1100.41 -1158.68,1087.25 -1088.65,1070.93 -1011.52,1049.06 -935.43,1023.32 -872.62,998.82 -810.87,971.68 -747.3,940.45 -685.15,906.5 -624.51,869.9 -614.19,864.37 -599.21,855.32 -585.74,847.02 -569.63,835.97 -551.73,823.87 -528.75,807.05 -502.31,787.12 -478.74,769.2 -458.79,767.27 v1@-442.39,767.14
  Layer 4 (Bottom Layer) w10: v1(-498.66,184.43) -478.95,184.43 ccw(c-478.95,197.81) D2.C@-469.48,188.35
EXPANSION_INT: J1.12 J2.11 | length 8291.9
  Layer 3 (GND) w10: v3(-1151.42,767.1) -1151.42,794.18 -1149.42,796.18 -1149.42,813.82 J1.12@-1148.52,814.72 ; J2.11@1148.5,814.72 1148.5,774.12 1155,767.62 v3(1155,766)
  Layer 4 (Bottom Layer) w6: -2297.73,902.37 -2298.01,902.29 -2375.27,879.33 -2393.36,868.85 -2398.09,864.12 -2398.09,826.36 -2484.88,739.57 -2484.88,679.45 -2480.73,675.3 -2467.31,675.3 -2466.62,674.61 -2443.04,674.61 -2439.56,678.1 -2436.42,678.1 -1276.47,688.62 -1220.64,688.62 -1153.14,756.13 -1153.14,762.56 -1150.62,765.07 -1150.62,766.31 v3(-1151.42,767.1) ; -2296.29,902.47 -2212.03,927.84 -2212.05,929.31 -2027.38,983.99 -2004.16,990.86 -1981.48,997.58 -1958.79,1004.3 -1934.04,1011.43 -1909.34,1018.15 -1884.54,1024.49 -1812.46,1040.67 -1739.75,1053.65 -1667.03,1063.33 -1624.87,1067.45 -1582.61,1070.47 -1520.87,1070.42 -1454.76,1070.33 -1388.64,1070.2 -1308.84,1063.29 -1229.5,1052.41 -1158.68,1039.25 -1088.65,1022.93 -1011.52,1001.06 -935.43,975.32 -872.62,950.82 -810.87,923.68 -747.3,892.45 -685.15,858.5 -624.51,821.9 -617.18,817.07 -509.59,738.46 -499.2,729.45 -494.01,723.42 -484.79,711.31 -479.4,705.92 -468.69,706.03 467.53,706.03 486.5,719.59 508.54,734.91 527.35,748.72 527.93,749.3 cw(c551.95,725.28) 551.95,759.25 655,837.18 664.91,844.49 670.27,848.66 673.34,851.07 684.89,857.72 747.04,891.68 810.61,922.91 872.36,950.04 935.17,974.55 1011.26,1000.28 1088.39,1022.16 1158.42,1038.47 1229.24,1051.63 1308.58,1062.51 1388.38,1069.42 1454.5,1069.56 1520.61,1069.64 1582.35,1069.69 1624.61,1066.67 1666.77,1062.56 1739.49,1052.88 1812.2,1039.89 1884.28,1023.71 1909.08,1017.37 1933.78,1010.66 1958.53,1003.53 1981.22,996.81 2003.91,990.08 2027.12,983.21 2211.79,928.53 2211.77,927.06 2296.03,901.69 ; v3(1155,766) 1228.02,692.98 1235.37,685.49 2434.22,674.61 ccw(c2434.22,683.38) 2440.42,677.18 2459.8,696.56 cw(c2470.15,686.21) 2470.15,700.85 ccw(c2470.15,714.77) 2480,704.93 2485.38,710.3 2485.38,737.62 2398.62,824.38 2398.62,862.13 2393.89,866.86 2375.8,877.34 ; 2296.26,901.39 2296.55,901.3 2373.8,878.34
GND: C1.1 C2.1 C5.1 C6.1 CONN_1.4 CONN_2.1 D1.2 D2.E IC1.C3 IC1.D4 IC1.D5 IC1.E3 IC2.D4 IC2.D5 IC2.E3 J1.6 J1.8 J1.15 J1.16 J2.15 J2.16 LED1.2 LED2.2 LED3.2 LED4.2 LED5.4 LED5.5 LED5.6 LED6.4 LED6.5 LED6.6 R5.1 U2.1 | length 868.6
  Layer 1 (Top Layer) w4: v7(-2706.96,585.42) -2706.96,597.18 -2706.84,597.3 IC1.D4@-2691.09,613.06 IC1.D5@-2675.34,613.06 ; IC1.C3@-2706.75,628.91 -2706.75,628.72 -2691.88,613.85 IC1.D4@-2691,613.85 ; LED1.2@-2481,310.09 -2478.75,307.83 LED1.2@-2475.93,307.83 ; R5.1@-372.08,681.89 R5.1@-361.14,681.89 ; LED2.2@2473.75,428.37 LED2.2@2475.56,426.56 ; IC2.E3@2608.62,591.81 2608.62,592.99 2610.79,595.16 2612.18,596.55 2613.19,596.55 2619.64,602.99 2619.64,604.01 2623.19,607.56 IC2.D5@2640.13,607.55 ; IC2.D5@2640.13,607.55 2655.83,591.85 2655.83,586.37 v1(2658.13,584.07)
  Layer 1 (Top Layer) w6: v1@-2510.44,602.72 v1@-2507.53,605.63 ; v1(-2509.54,602.72) v1@-2509.54,603.62 ; C6.1@-2499.58,605.69 -2499.53,605.63 C6.1@-2498.6,606.56 ; C2.1@2724.92,581.51 2730.97,584.16 2741.89,584.16 v1(2750.76,593.03) 2753.47,593.03 2757.89,597.45 2758.39,597.45 2759.88,598.94 2759.88,614.25 C1.1@2765.05,619.42
  Layer 1 (Top Layer) w8: C6.1@-2499.58,605.69 C5.1@-2499.58,651.43 ; v1(-2333.09,774.3) -2333.09,777.04 -2327.49,782.64 LED3.2@-2327.49,813.5 ; R5.1@-361.14,681.89 cw(c-361.14,617.37) v4(-315.51,662.99) ; v1(2294.91,857.82) 2326.66,889.57 cw(c2370.99,845.24) LED4.2@2370.99,907.93
  Layer 1 (Top Layer) w10: LED1.2@-2479.1,311.99 -2478.95,311.99 -2471.84,319.1 -2471.72,318.97 -2448,318.97 v1(-2447.81,318.78) ; LED2.2@2479.1,430.1 2484.97,424.23 v1(2505.87,424.23)
  Layer 3 (GND) w10: 392.46,549.45 384.04,571.02 397.67,579.26
  Layer 3 (GND) w13: 392.46,549.45 403.77,488.61
  Layer 4 (Bottom Layer) w6: LED6.4@2636.76,870.39 LED6.5@2659.41,870.39 ; LED6.5@2662.87,870.18 2685.17,870.18 2685.52,869.83 2685.98,870.3 LED6.6@2685.98,870.39
  Layer 4 (Bottom Layer) w8: v1(-2703.42,858.47) -2702.42,858.47 -2695.55,865.34 -2692.86,865.34 -2688,870.2 LED5.6@-2634.85,870.2
  Layer 4 (Bottom Layer) w10: D2.E@-619.37,163.27 -596.53,163.27 ccw(c-596.53,173.24) -589.48,166.19 cw(c-588.54,165.25) -588.54,166.58 v1(-587.92,166.58) ; D1.2@-140.75,767.67 -140.75,768.25 -111.3,797.7 -66.86,797.7 v1(-66.26,797.09)
  other v1: 2698.42,860.08
I2C_SCL: IC1.E5 IC2.E5 J1.10 J2.9 | length 8801.1
  Layer 1 (Top Layer) w4: IC1.E5@-2675.34,597.3 -2665.33,587.3 -2486.9,587.3 -2486.56,587.64 -2474.64,587.64 -2470.95,591.33 -2470.95,666.06 ccw(c-2482.64,666.06) -2474.37,674.33 cw(c-2463.22,685.48) -2478.99,685.48 -2478.99,693.13 cw(c-2396.15,669.36) v1(-2457.09,730.3) ; 2513.54,629.26 2526.97,629.26 2537.49,618.74 2537.49,618.61 2548.7,607.4 2548.7,588.02 2564.08,572.64 2619.77,572.64 2627.93,580.8 2628.94,580.8 2635.38,587.24 2635.38,588.26 2638.94,591.81 IC2.E5@2640.12,591.81
  Layer 1 (Top Layer) w6: v1(2470.38,716.52) ccw(c2476.46,716.52) 2472.16,712.21 2478.11,706.26 2478.11,665.71 ccw(c2494.66,665.71) 2482.95,654.01 2503.57,633.4 ccw(c2513.54,643.37) 2513.54,629.26
  Layer 3 (GND) w10: v3(-1172.25,771.73) -1172.25,773.35 -1168.2,777.4 J1.10@-1168.2,814.72 ; J2.9@1168.19,814.72 1168.19,780.51 1175.35,773.35 v3(1175.35,771.73)
  Layer 4 (Bottom Layer) w6: v1@-2459.79,730.3 -2464.92,735.43 -2474.88,735.43 ; -2297.73,890.37 -2298.01,890.29 -2375.27,867.33 -2386.42,860.87 -2386.42,823.12 -2387.19,823.12 -2474.88,735.43 ; -2296.29,890.47 -2212.03,915.84 -2212.05,917.31 -2027.38,971.99 -2004.16,978.86 -1981.48,985.58 -1958.79,992.3 -1934.04,999.43 -1909.34,1006.15 -1884.54,1012.49 -1812.46,1028.67 -1739.75,1041.65 -1667.03,1051.33 -1624.87,1055.45 -1582.61,1058.47 -1520.87,1058.42 -1454.76,1058.33 -1388.64,1058.2 -1308.84,1051.29 -1229.5,1040.41 -1158.68,1027.25 -1088.65,1010.93 -1011.52,989.06 -935.43,963.32 -872.62,938.82 -810.87,911.68 -747.3,880.45 -685.15,846.5 -624.51,809.9 -510.51,725.59 -501.89,717.16 -495.65,708.03 -484.87,695.5 -474.2,694.7 469.14,694.7 469.65,695.2 491.17,710.08 534.11,740.93 cw(c554,721.04) 554,749.16 555.58,749.16 654.81,824.28 678.08,841.93 680.91,842.95 684.89,845.72 747.04,879.68 810.61,910.91 872.36,938.04 935.17,962.55 1011.26,988.28 1088.39,1010.16 1158.42,1026.47 1229.24,1039.63 1308.58,1050.51 1388.38,1057.42 1454.5,1057.56 1520.61,1057.64 1582.35,1057.69 1624.61,1054.67 1666.77,1050.56 1739.49,1040.88 1812.2,1027.89 1884.28,1011.71 1909.08,1005.37 1933.78,998.66 1958.53,991.53 1981.22,984.81 2003.91,978.08 2027.12,971.21 2211.79,916.53 2211.77,915.06 2296.03,889.69 ; v3(-1172.25,771.73) -1243.65,700.32 -1298.42,700.32 -2436.49,689.89 -2441.91,689.89 -2447.18,684.61 -2462.48,684.61 -2463.16,685.3 -2469.11,685.3 -2474.88,691.07 -2474.88,735.43 ; v3(1175.35,771.73) 1177.26,769.82 1182.45,769.82 1255.06,697.22 2420.56,686.53 2425.72,686.53 ccw(c2425.72,699.22) 2434.7,690.25 2453.4,708.95 2453.4,717.42 2453.62,717.64 ; 2296.26,889.39 2296.55,889.3 2373.8,866.34 ; 2375.8,865.34 2386.95,858.88 2386.95,821.64 2431.28,777.31 2431.54,777.31 2453.62,755.23 2453.62,717.64 ; v1(2470.38,716.52) 2469.25,717.64 2453.62,717.64
I2C_SDA: IC1.E4 IC2.E4 J1.11 J2.12 | length 8977.7
  Layer 1 (Top Layer) w4: IC1.E4@-2691.09,597.31 -2691.09,589.06 -2681.32,579.3 -2483.58,579.3 -2483.24,579.64 -2463.73,579.64 -2446.41,596.96 v1(-2446.41,615.19) ; v1(2493.36,667.76) 2519.52,641.6 ccw(c2525.71,647.79) 2525.71,639.03 cw(c2525.71,628.32) 2533.29,635.9 2544.24,624.95 cw(c2541.22,621.93) 2545.49,622.06 cw(c2541.22,621.93) 2545.49,621.93 2556.7,610.72 2556.7,591.34 2567.4,580.64 2613.25,580.64 IC2.E4@2624.38,591.8 IC2.E4@2624.37,591.81
  Layer 3 (GND) w10: J1.11@-1148.52,661.18 -1148.27,660.94 -1148.27,634.62 -1140.68,627.02 v3(-1130.02,627.02) ; v3(1138.93,624.27) 1148.5,633.85 J2.12@1148.5,661.18
  Layer 4 (Bottom Layer) w6: v1@-2448.96,615.24 -2504.88,671.17 -2504.88,747.85 -2421.09,831.65 -2421.09,874.25 -2412,883.34 -2393.36,892.85 -2375.27,903.33 -2298.01,926.29 -2297.73,926.37 ; v1(-2446.41,615.19) -2446.41,615.4 -2444.65,617.16 -2435.72,617.16 -1282.57,627.63 -1220.65,627.63 -1220.65,629.38 -1218.2,631.84 -1209,631.92 -1201.01,631.99 ; -2296.29,926.47 -2212.03,951.84 -2212.05,953.31 -2027.38,1007.99 -2004.16,1014.86 -1981.48,1021.58 -1958.79,1028.3 -1934.04,1035.43 -1909.34,1042.15 -1884.54,1048.49 -1812.46,1064.67 -1739.75,1077.65 -1667.03,1087.33 -1624.87,1091.45 -1582.61,1094.47 -1520.87,1094.42 -1454.76,1094.33 -1388.64,1094.2 -1308.84,1087.29 -1229.5,1076.41 -1158.68,1063.25 -1088.65,1046.93 -1011.52,1025.06 -935.43,999.32 -872.62,974.82 -810.87,947.68 -747.3,916.45 -685.15,882.5 -624.51,845.9 -599.64,831.18 -570.65,810.7 -526.68,779.34 -491.01,752.29 -481.74,743.89 -477.21,737.85 -469.67,734.79 -393.65,734.39 -315.65,812.39 304.62,812.39 384.16,732.85 465.34,732.85 485.75,745.94 511.86,763.79 517.24,766.89 520.23,769.87 cw(c544.93,745.16) 544.93,780.1 633.56,846.87 638.4,850.97 651.22,860.8 659.19,866.53 664.18,869.2 668.58,871.77 669.8,872.68 684.89,881.72 747.04,915.68 810.61,946.91 872.36,974.04 935.17,998.55 1011.26,1024.28 1088.39,1046.16 1158.42,1062.47 1229.24,1075.63 1308.58,1086.51 1388.38,1093.42 1454.5,1093.56 1520.61,1093.64 1582.35,1093.69 1624.61,1090.67 1666.77,1086.56 1739.49,1076.88 1812.2,1063.89 1884.28,1047.71 1909.08,1041.37 1933.78,1034.66 1958.53,1027.53 1981.22,1020.81 2003.91,1014.08 2027.12,1007.21 2211.79,952.53 2211.77,951.06 2296.03,925.69 ; -1209,631.99 -1201.01,631.99 ; v3(-1130.02,627.02) -1135.59,632.59 -1201.01,631.99 ; v3(1138.93,624.27) 1266.24,624.27 2441.52,613.6 2448.98,621.05 2450.04,621.05 2453.6,624.62 2453.6,627.58 2468.25,642.22 2469.88,642.22 ; 2296.26,925.39 2296.55,925.3 2373.8,902.34 ; 2375.8,901.34 2393.89,890.86 2412.53,881.35 2421.62,872.26 2421.62,829.66 2505.38,745.9 2505.38,702.02 2493.36,690 v1(2493.36,667.76) 2493.36,658.4 cw(c2475.57,658.4) 2488.15,645.82 cw(c2483.65,650.32) 2483.65,643.96 2475.03,643.96 ccw(c2475.03,635.44) 2469.88,642.22 ; 2469.01,641.46 cw(c2475.03,635.44) 2469.88,642.22
IMU_INT: J1.9 J2.10 | length 8642
  Layer 3 (GND) w10: J1.9@-1168.2,661.18 -1168.2,626.27 v3(-1149.34,607.41) ; v3(1126.26,602) 1127.4,603.15 1141.85,603.15 1155.93,617.23 1155.93,621.23 1168.19,633.5 J2.10@1168.19,661.18
  Layer 4 (Bottom Layer) w6: -2297.73,938.37 -2298.01,938.29 -2375.27,915.33 -2393.36,904.85 -2412,895.34 -2415.05,895.34 -2432.09,878.3 -2432.09,836.3 -2514.88,753.5 -2514.88,662.12 -2453,600.23 -2452.67,600.23 -2452.62,600.19 -2440.2,600.19 -2433.74,606.65 -2416.99,606.65 -1275.71,617.01 -1213.7,617.01 -1208.96,621.75 ; -2296.29,938.47 -2212.03,963.84 -2212.05,965.31 -2027.38,1019.99 -2004.16,1026.86 -1981.48,1033.58 -1958.79,1040.3 -1934.04,1047.43 -1909.34,1054.15 -1884.54,1060.49 -1812.46,1076.67 -1739.75,1089.65 -1667.03,1099.33 -1624.87,1103.45 -1582.61,1106.47 -1520.87,1106.42 -1454.76,1106.33 -1388.64,1106.2 -1308.84,1099.29 -1229.5,1088.41 -1158.68,1075.25 -1088.65,1058.93 -1011.52,1037.06 -935.43,1011.32 -872.62,986.82 -810.87,959.68 -747.3,928.45 -685.15,894.5 -624.51,857.9 -593.5,839.8 -544.25,804.99 -493.27,767.27 -479.05,755.42 -469.65,746.39 -398.65,746.39 -322.65,822.39 -168.61,822.39 -167.41,823.6 312.41,823.6 390.39,745.61 464.25,745.61 465.02,746.38 481.68,756.02 500.68,771.23 526.51,788.69 608.66,846.53 616.72,851.98 629.32,859.97 652.02,873.85 658.47,878.09 667.91,883.45 684.89,893.72 747.04,927.68 810.61,958.91 872.36,986.04 935.17,1010.55 1011.26,1036.28 1088.39,1058.16 1158.42,1074.47 1229.24,1087.63 1308.58,1098.51 1388.38,1105.42 1454.5,1105.56 1520.61,1105.64 1582.35,1105.69 1624.61,1102.67 1666.77,1098.56 1739.49,1088.88 1812.2,1075.89 1884.28,1059.71 1909.08,1053.37 1933.78,1046.66 1958.53,1039.53 1981.22,1032.81 2003.91,1026.08 2027.12,1019.21 2211.79,964.53 2211.77,963.06 2296.03,937.69 ; -1208.96,621.88 -1166.91,622.27 -1152.05,607.41 v3(-1149.34,607.41) ; v3(1126.26,602) 1127.06,602.8 1138.67,602.8 1150.14,614.27 1262.1,614.27 1262.92,613.45 1281.51,613.45 2422.79,603.09 2444.31,603.09 ccw(c2444.31,616.94) 2454.1,607.14 2459.55,612.59 ccw(c2453.54,618.59) 2462.03,618.59 2463.97,620.53 cw(c2471.84,620.53) 2466.27,626.09 2467.6,627.42 ; 2296.26,937.39 2296.55,937.3 2373.8,914.34 ; 2375.8,913.34 2393.89,902.86 2412.53,893.35 2415.58,893.35 2432.62,876.31 2432.62,834.31 2515.38,751.56 2515.38,697.88 2508.36,690.86 2508.36,646.1 2507.29,645.03 2507.29,644.76 2495.32,632.78 2485.44,632.78 2485.35,632.87 2479.63,632.87 ccw(c2479.63,620.15) 2473.66,631.38 ccw(c2473.66,626.34) 2470.09,629.9 2468.41,628.22
LED_LEFT_FRONT_B: IC1.A1 LED5.3 | length 254.9
  Layer 1 (Top Layer) w4: v1(-2773.09,676.3) -2757.09,660.3 IC1.A1@-2738.33,660.3
  Layer 4 (Bottom Layer) w6: v1(-2773.09,676.3) -2773.09,781.27 ; -2772.98,781.27 cw(c-2758.68,781.27) -2768.79,791.38 -2759.6,800.57 cw(c-2738.7,779.68) -2738.7,809.22 -2738.7,809.3 -2720.07,809.3 ; LED5.3@-2691.34,830.5 cw(c-2701.43,830.5) -2694.3,823.36 -2700.5,817.15 cw(c-2720.07,836.73) -2716.36,809.3 ; -2720.07,809.3 -2716.36,809.3 ; -2720.07,809.3 -2720.07,809.05 ccw(c-2720.07,836.73) -2716.36,809.3
LED_LEFT_FRONT_G: IC1.A2 LED5.1 | length 308.2
  Layer 1 (Top Layer) w4: IC1.A2@-2722.58,660.3 -2722.58,673.55
  Layer 1 (Top Layer) w6: v1(-2740.11,678.11) -2727.15,678.11 -2722.58,673.55
  Layer 4 (Bottom Layer) w6: v1(-2740.11,678.11) -2743.45,678.11 -2744.09,677.47 -2744.09,739.3 -2634.51,739.3 -2634.51,823.56 ; -2634.29,822.74 -2634.29,836.93 LED5.1@-2632.84,836.93
LED_LEFT_FRONT_R: IC1.D1 LED5.2 | length 357.4
  Layer 1 (Top Layer) w4: v1(-2762.09,612.3) -2761.33,613.05 IC1.D1@-2738.33,613.06
  Layer 4 (Bottom Layer) w4: v1(-2762.09,612.3) -2776.09,626.3 -2776.09,650.51 -2759.09,667.51
  Layer 4 (Bottom Layer) w6: -2759.09,667.51 -2759.09,669.08 -2758.09,670.08 -2758.09,749.3 -2663.09,749.3 -2663.09,832.56 LED5.2@-2663.54,832.56 ; LED5.2@-2659.41,832.56 LED5.2@-2659.41,836.93
LED_LEFT_SIDE_B: IC1.C1 LED1.4 | length 550.5
  Layer 1 (Top Layer) w4: v2@-2748.75,628.35 IC1.C1@-2738.78,628.35
  Layer 1 (Top Layer) w6: v2(-2749.3,627.8) v2@-2748.75,628.35 ; IC1.C1@-2738.78,628.35 IC1.C1@-2738.33,628.8 ; LED1.4@-2493.64,382.63 -2474.04,382.63 -2464.12,392.55 v1(-2461.42,392.55)
  Layer 4 (Bottom Layer) w4: v2@-2747.09,625.58 -2747.09,593.3 -2719.09,565.3 -2630.09,565.3 -2622.09,573.3
  Layer 4 (Bottom Layer) w6: v2(-2749.3,627.8) v2@-2747.09,625.58 ; -2622.09,573.3 -2482.63,573.3 -2471.09,561.75 -2471.09,461.3 ; -2471.28,458.85 -2471.28,430.71 ccw(c-2446.2,430.71) -2463.93,412.97 -2463.93,395.45 v1@-2468.09,391.3